# EAGLE board master_muhsin_v4 (EAGLE 7.1.0)
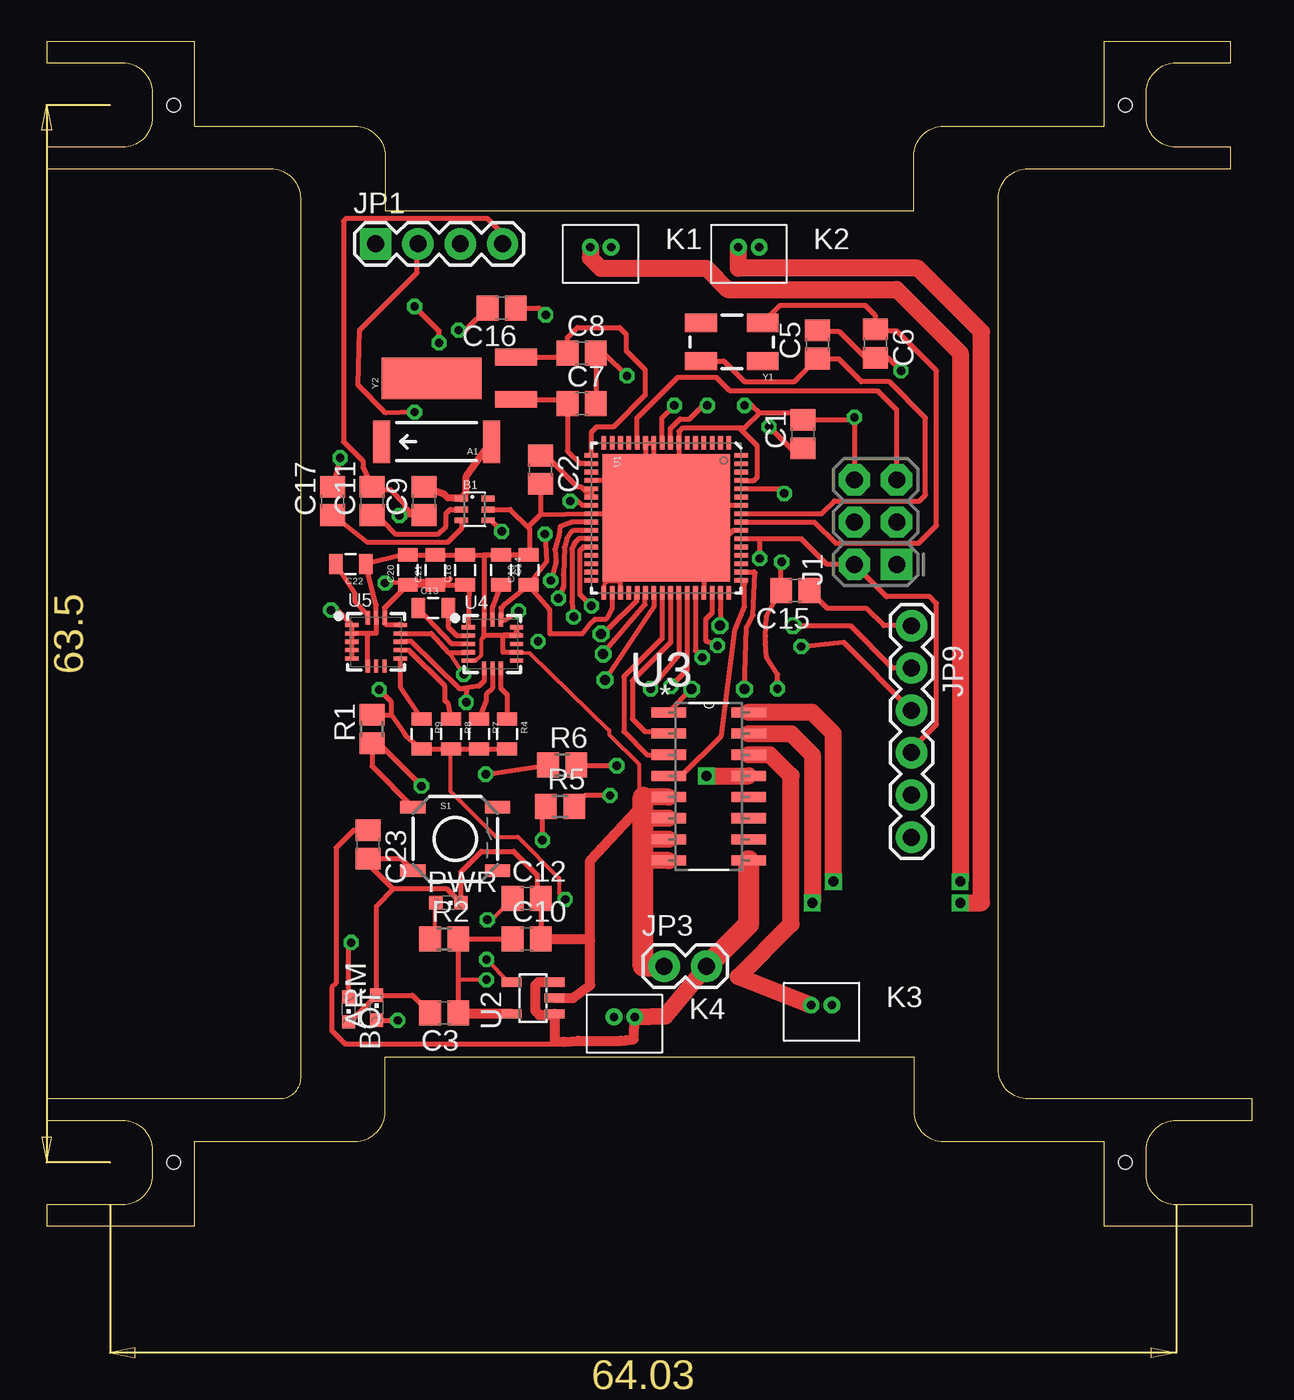
[diagram p0: board, top side]
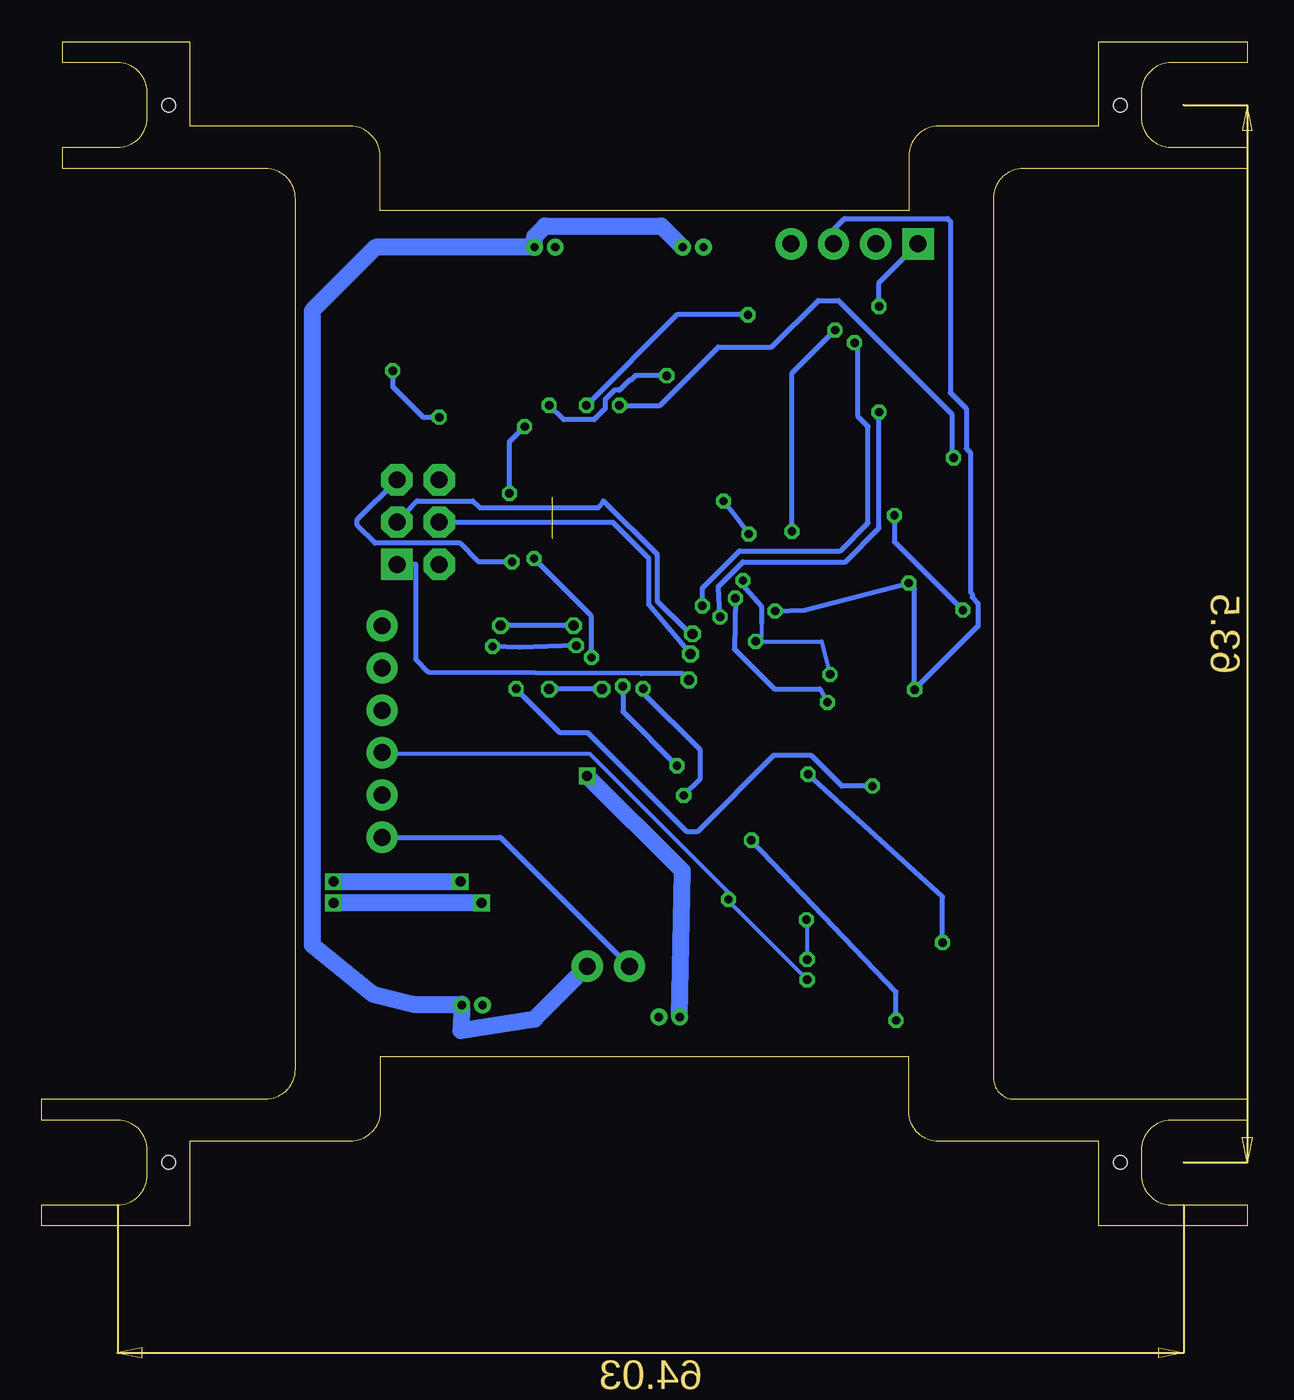
[diagram p1: board, bottom side, seen from below]

Size 72.39 x 71.12 mm. Coordinates in mm from the lower left corner, seen from the top.
Outline: 15.24,61.7 15.24,8.89 arc-90 13.97,7.62 0,7.62 0,6.35 4.55,6.35 arc-90 6.35,4.55 6.35,3.07 arc-90 4.55,1.27 0,1.27 0,0 8.89,0 8.89,5.08 18.52,5.08 arc90 20.32,6.88 20.32,10.16 52.07,10.16 52.07,6.88 arc90 53.87,5.08 63.5,5.08 63.5,0 72.39,0 72.39,1.27 67.84,1.27 arc-90 66.04,3.07 66.04,4.55 arc-90 67.84,6.35 72.39,6.35 72.39,7.62 58.95,7.62 arc-90 57.15,9.42 57.15,61.7 arc-90 58.95,63.5 71.12,63.5 71.12,64.77 67.84,64.77 arc-90 66.04,66.57 66.04,68.05 arc-90 67.84,69.85 71.12,69.85 71.12,71.12 63.5,71.12 63.5,66.04 53.87,66.04 arc90 52.07,64.24 52.07,60.96 20.32,60.96 20.32,64.24 arc90 18.52,66.04 8.89,66.04 8.89,71.12 0,71.12 0,69.85 4.55,69.85 arc-90 6.35,68.05 6.35,66.57 arc-90 4.55,64.77 0,64.77 0,63.5 13.44,63.5 arc-90 15.24,61.7
Copper layers (1*16): Top 0.035559375mm / dielectric 1.501140625mm / Bottom 0.035559375mm
Design rules "4pcb-33board": minimum track width 10mil, minimum drill 15mil, track to track 6mil, track to pad 6mil, pad to pad 6mil, via to via 6mil, smd to smd 6mil, copper to edge 10mil, drill to drill 10mil, minimum pad ring 10mil, minimum via ring 8mil, stop-mask expansion 4mil, vias tented up to drill 0mil, thermal gap 10mil
Net classes: 1 RFSIG: width 0.457 mm, clearance 0.205 mm to class 0, clearance 0.205 mm
Holes 0.8 mm at 7.62,67.31 64.77,67.31 64.77,3.81 7.62,3.81

## Footprints (pad centres in the part's own frame; a part is rotated, then mirrored left to right if it is on the bottom)
ANTENNA-CHIP5 = smd 1.016 x 2.54: FEED -3.302,0; NC 3.302,0
CHIPLED_0603 = smd 0.8 x 0.8: A 0,-0.75; C 0,0.75
BALUN = smd 0.35 x 0.8: 1 -0.65,-0.8; 2 0,-0.8; 3 0.65,-0.8; 4 0.65,0.8; 5 0,0.8; 6 -0.65,0.8
C0805 = smd 1.3 x 1.5: 1 -0.85,0; 2 0.85,0
0805 = smd 0.8 x 1.2: 1 -0.9,0; 2 0.9,0
2X3-NS = drill 1.016 pad 1.88 square: 1 -2.54,-1.27 | drill 1.016 pad 1.88 octagon: 2 -2.54,1.27; 3 0,-1.27; 4 0,1.27; 5 2.54,-1.27; 6 2.54,1.27
1X04 = drill 1.016 pad 1.88 square: 1 0,0 | drill 1.016 pad 1.88: 2 2.54,0; 3 5.08,0; 4 7.62,0
1X02 = drill 1.016 pad 1.88: 1 0,0; 2 2.54,0
FTDI_BASIC = drill 1.016 pad 1.88: CTS 10.16,0; DTR 0,0; GND 12.7,0; RXI 2.54,0; TXO 5.08,0; VCC 7.62,0
653002114822 = drill 0.5: 1 0.625,0; 2 -0.625,0
R0805 = smd 1.3 x 1.5: 1 -0.85,0; 2 0.85,0
TACTILE_SWITCH_SMD = smd 1.524 x 0.762: 1 -2.54,1.905; 2 2.54,1.905; 3 -2.54,-1.905; 4 2.54,-1.905
QFN-64 = smd 0.8 x 0.28: 1 -4.5,3.75; 2 -4.5,3.25; 3 -4.5,2.75; 4 -4.5,2.25; 5 -4.5,1.75; 6 -4.5,1.25; 7 -4.5,0.75; 8 -4.5,0.25; 9 -4.5,-0.25; 10 -4.5,-0.75; 11 -4.5,-1.25; 12 -4.5,-1.75; 13 -4.5,-2.25; 14 -4.5,-2.75; 15 -4.5,-3.25; 16 -4.5,-3.75; 33 4.5,-3.75; 34 4.5,-3.25; 35 4.5,-2.75; 36 4.5,-2.25; 37 4.5,-1.75; 38 4.5,-1.25; 39 4.5,-0.75; 40 4.5,-0.25; 41 4.5,0.25; 42 4.5,0.75; 43 4.5,1.25; 44 4.5,1.75; 45 4.5,2.25; 46 4.5,2.75; 47 4.5,3.25; 48 4.5,3.75 | smd 0.28 x 0.8: 17 -3.75,-4.5; 18 -3.25,-4.5; 19 -2.75,-4.5; 20 -2.25,-4.5; 21 -1.75,-4.5; 22 -1.25,-4.5; 23 -0.75,-4.5; 24 -0.25,-4.5; 25 0.25,-4.5; 26 0.75,-4.5; 27 1.25,-4.5; 28 1.75,-4.5; 29 2.25,-4.5; 30 2.75,-4.5; 31 3.25,-4.5; 32 3.75,-4.5; 49 3.75,4.5; 50 3.25,4.5; 51 2.75,4.5; 52 2.25,4.5; 53 1.75,4.5; 54 1.25,4.5; 55 0.75,4.5; 56 0.25,4.5; 57 -0.25,4.5; 58 -0.75,4.5; 59 -1.25,4.5; 60 -1.75,4.5; 61 -2.25,4.5; 62 -2.75,4.5; 63 -3.25,4.5; 64 -3.75,4.5 | smd 7.65 x 7.65: 65 0,0
SOT23-DBV = smd 0.55 x 1.2: 1 -0.95,-1.3; 2 0,-1.3; 3 0.95,-1.3; 4 0.95,1.3; 5 -0.95,1.3
SOIC127P600X175-16N = smd 2.057 x 0.61: 1 -4.801,8.89; 2 -4.801,7.62; 3 -4.801,6.35; 4 -4.801,5.08; 5 -4.801,3.81; 6 -4.801,2.54; 7 -4.801,1.27; 8 -4.801,0; 9 0,0; 10 0,1.27; 11 0,2.54; 12 0,3.81; 13 0,5.08; 14 0,6.35; 15 0,7.62; 16 0,8.89
LGA16_3X3MM = smd 0.8 x 0.25: 1 -1.45,1; 2 -1.45,0.5; 3 -1.45,0; 4 -1.45,-0.5; 5 -1.45,-1; 9 1.45,-1; 10 1.45,-0.5; 11 1.45,0; 12 1.45,0.5; 13 1.45,1 | smd 0.25 x 0.8: 6 -0.5,-1.45; 7 0,-1.45; 8 0.5,-1.45; 14 0.5,1.45; 15 0,1.45; 16 -0.5,1.45
CRYSTAL-SMD-5X3 = smd 1.9 x 1.1: 1 -1.85,-1.15; 2 1.85,-1.15; 3 1.85,1.15; 4 -1.85,1.15
CRYSTAL-32KHZ-SMD = smd 2.5 x 6: SHEILD 0,5.08 | smd 1 x 2.5: X1 -1.27,0; X2 1.27,0

## Placement (x,y rotation side)
A1  ANTENNA2SMD5  [ANTENNA-CHIP5]  23.42,47.09 180 top
ARM  GREEN  [CHIPLED_0603]  19.81,13.11 0 top
B1  748421245  [BALUN]  25.7,43.03 270 top
BOT  GREEN  [CHIPLED_0603]  18.14,13 180 top
C1  1uF  [C0805]  45.42,47.55 90 top
C2  1uF  [C0805]  29.67,45.42 270 top
C3  1uF  [C0805]  23.88,12.8 180 top
C5  12pF  [C0805]  46.28,52.93 90 top
C6  12pF  [C0805]  49.78,52.98 270 top
C7  12pF  [C0805]  32.13,49.38 0 top
C8  12pF  [C0805]  32.13,52.43 0 top
C9  0.75pF  [C0805]  22.66,43.54 90 top
C10  1uF  [C0805]  28.83,17.25 0 top
C11  22pF  [C0805]  19.56,43.54 90 top
C12  10nF  [C0805]  28.83,19.66 0 top
C13  0.22uF  [0805]  23.22,37.11 0 top
C14  4.7uF  [0805]  27.28,39.4 270 top
C15  0.1uF  [C0805]  44.96,38.15 180 top
C16  JUMP  [C0805]  27.33,55.12 180 top
C17  JUMP  [C0805]  17.17,43.54 90 top
C18  10uF  [0805]  25.12,39.4 90 top
C19  0.1uF  [0805]  28.93,39.4 90 top
C20  10uF  [0805]  21.69,39.4 90 top
C21  0.1uF  [0805]  23.34,39.4 90 top
C22  10nF (25V)  [0805]  18.26,39.75 180 top
C23  1uF  [C0805]  19.3,22.91 270 top
J1  ISP  [2X3-NS]  49.78,42.27 90 top
JP1  Debuger  [1X04]  19.76,58.98 0 top
JP3  Battery  [1X02]  37.08,15.6 0 top
JP9  FTDI  [FTDI_BASIC]  51.94,36.04 270 top
K1  653002114822  [653002114822]  33.27,58.78 0 top
K2  653002114822  [653002114822]  42.16,58.78 0 top
K3  653002114822  [653002114822]  46.53,13.26 0 top
K4  653002114822  [653002114822]  34.7,12.55 0 top
PWR  RED  [CHIPLED_0603]  24.13,19.41 270 top
R1  10k  [R0805]  19.53,29.84 90 top
R2  330  [R0805]  23.88,17.25 0 top
R4  10k  [0805]  27.66,29.54 270 top
R5  330  [R0805]  30.84,25.2 0 top
R6  330  [R0805]  30.96,27.69 0 top
R7  10k  [0805]  25.96,29.54 270 top
R8  10k  [0805]  24.28,29.54 270 top
R9  10k  [0805]  22.5,29.54 270 top
S1  [TACTILE_SWITCH_SMD]  24.54,23.24 0 top
U1  ATMEGA128RFA1  [QFN-64]  37.21,42.52 270 top
U2  TPS73633-DBVT  [SOT23-DBV]  29.21,13.69 90 top
U3  ULN2003ADR  [SOIC127P600X175-16N]  42.16,21.95 0 top
U4  LSM303D  [LGA16_3X3MM]  26.77,34.95 0 top
U5  L3GD20H  [LGA16_3X3MM]  19.79,35.08 0 top
Y1  16MHz  [CRYSTAL-SMD-5X3]  41.15,53.09 180 top
Y2  32.768kHz  [CRYSTAL-32KHZ-SMD]  28.19,50.9 90 top

## Library data of the parts
A1 B1 = SparkFun-RF
ARM BOT PWR = led
C1-C3 C5-C12 C15-C17 C23 R1 R2 R5 R6 = resistor
C13 C14 C18-C22 = SparkFun-Capacitors
J1 JP1 JP9 = SparkFun-Connectors
JP3 = SparkFun
K1-K4 = Wuerth_Elektronik_eiCan_Wire_to_Board_Connectors; OC_FARNELL: unknown
R4 R7-R9 = SparkFun-Passives
S1 = SparkFun-Electromechanical
U1 = SparkFun-DigitalIC
U2 = Power
U3 = Texas Instruments_By_element14_Batch_1; MPN: ULN2003ADR; OC_FARNELL: 1470513; OC_NEWARK: 77C3560; PACKAGE: SOIC-16; SUPPLIER: TEXAS INSTRUMENTS
U4 U5 = IMU_parts
Y1 Y2 = SparkFun-FreqCtrl

## Nets
3.3V: C3.1 C10.1 C18.1 C19.1 C20.1 C21.1 J1.2 JP1.3 JP9.VCC R1.2 R2.2 R4.2 R7.2 R8.2 R9.2 U1.23 U1.34 U1.44 U1.54 U1.59 U2.5 U4.1 U4.14 U5.13 U5.14
AVDD: C1.1 U1.60
DTR: C15.1 JP9.DTR
DVDD: C2.1 U1.21 U1.22
GND: ARM.C B1.5 BOT.C C1.2 C2.2 C3.2 C5.2 C6.2 C7.2 C8.2 C9.1 C10.2 C11.2 C12.2 C14.1 C18.2 C19.2 C20.2 C21.2 C22.1 C23.2 J1.6 JP1.4 JP3.1 JP9.GND PWR.C S1.3 U1.7 U1.10 U1.11 U1.20 U1.24 U1.33 U1.35 U1.45 U1.55 U1.58 U1.61 U1.65 U2.2 U3.5 U3.6 U3.7 U3.8 U4.5 U4.10 U4.12 U4.13 U4.16 U5.1 U5.2 U5.3 U5.4 U5.5 U5.6 U5.15
MISO: J1.1 U1.39
MOSI: J1.4 U1.38
N$1: C12.1 U2.4
N$2: PWR.A R2.1
N$3: C5.1 U1.57 Y1.3
N$4: C6.1 U1.56 Y1.1
N$5: C7.1 U1.18 Y2.X1
N$6: C8.1 U1.17 Y2.X2
N$7: B1.2 C11.1
N$8: ARM.A R5.1
N$9: C13.1 U4.3
N$10: B1.4 C16.2
N$11: B1.3 C17.1
N$12: C13.2 U4.2
N$13: BOT.A R6.1
N$14: R4.1 U4.8
N$15: R7.1 U4.7
N$16: C14.2 U4.15
N$17: R8.1 U5.10
N$18: R9.1 U5.9
N$19: C22.2 U5.16
N$29: K1.2 U3.16
N$30: K2.2 U3.15
N$31: K3.2 U3.14
N$32: K4.2 U3.13
PB4: U1.40 U3.3
PB5: U1.41 U3.2
PB6: R5.2 U1.42
PB7: R6.2 U1.43
PE3: U1.49 U3.4
PE4: U1.50 U3.1
RESET: C15.2 J1.5 R1.1 S1.1 U1.12
RFANT [RFSIG]: A1.FEED B1.1 C9.2
RFN: C17.2 U1.9
RFP: C16.1 U1.8
RX0: JP9.TXO U1.46
RX1: JP1.2 U1.27
SCK: J1.3 U1.37
SCL: U1.25 U4.4 U5.12
SDA: U1.26 U4.6 U5.11
TX0: JP9.RXI U1.47
TX1: JP1.1 U1.28
VBAT: C23.1 JP3.2 K1.1 K2.1 K3.1 K4.1 U2.1 U2.3 U3.9

## Tracks (layer width: path | path; a pad name or v marks a point on that pad's centre or on a via)
3.3V  (via drill 0.5)  (1 unrouted)
  Top 0.254: R4.2 24.24,28.64 24.23,28.65 24.23,26.11 26.98,23.37 28.3,23.37 30.78,20.88 30.78,19.96 v31.14,19.61 | v26.42,14.78 24.73,14.78
  Top 0.305: 42.72,41.25 45.34,41.25 46.86,39.73 J1.2 50.44,37.8 53.04,37.8 53.44,37.39 53.44,30.12 51.94,28.63 JP9.VCC | 42.72,41.25 41.73,41.25 U1.54 | U4.1 25.38,38.42 C18.1 23.88,38.49 | U5.14 20.3,37.11 C20.1 C21.1 23.88,38.49 | U5.14 | C19.1 27.55,37.36 27.53,37.36 27.28,37.11 U4.14 27.56,36.4 v28.35,36.93 | U1.23 32.17,43.27 31.95,43.48 v31.45,43.54 | v29.92,41.55 30.02,39.89 C19.1 | C10.1 R2.2 24.73,14.78 C3.1 | R1.2 20.71,30.7 | 20.71,30.7 21.49,29.57 21.58,29.41 R9.2 R8.2 R7.2 R4.2 | U5.14 20.3,36.2 20.37,36.12 21.2,36.12 U5.13 | v20.32,38.61 24.23,38.85 23.88,38.49 | 20.71,30.7 20.71,31.46 v19.96,32.21 | U1.34 33.96,37.06 33.68,36.52 33.58,36.42 32.92,36.42 32.61,36.12 32.16,35.56 30.23,35.56 30.23,36.98 30.17,37.03 30.19,37.03 C19.1 | U1.44 38.96,34.55 v39.37,34.14 | v42.82,40.08 42.82,41.15 42.72,41.25
  Top 0.61: U2.5 24.79,12.74 C3.1
  Bottom 0.254: v26.42,14.78 31.14,19.51 v31.14,19.61 31.14,20.02 39.47,28.35 51.87,28.35 JP9.VCC
  Bottom 0.305: v31.45,43.54 30.84,42.77 v29.92,41.55 | v28.35,36.93 26.57,36.98 v20.32,38.61 19.96,38.25 v19.96,32.21 16.15,36.02 16.15,37.39 16.51,37.74 16.51,37.95 16.61,38.05 16.61,46.43 16.87,46.69 16.87,49.07 17.83,50.04 17.83,60.35 17.98,60.5 24.18,60.5 24.84,59.84 JP1.3 | v39.37,34.14 39.37,36.63 v42.82,40.08
AVDD  (via drill 0.5)
  Top 0.305: U1.60 44.02,44.27 v44.3,43.99 | v43.38,48.01 44.91,46.48 45.2,46.48 C1.1
  Bottom 0.305: v44.3,43.99 44.3,47.09 v43.38,48.01
DTR
  Top 0.305: JP9.DTR 50.27,36.04 49.23,37.08 46.88,37.08 C15.1
DVDD
  Top 0.305: C2.1 29.99,46.27 31.85,44.4 32.08,44.4 U1.22 U1.21
GND  (via drill 0.5)
  Top 0.254: U4.5 25.77,33.95 26.11,34.29 26.11,35.2 26.16,35.26 | 26.16,35.26 26.37,35.46 | 26.16,35.26 26.16,35.31 26.31,35.46 27.38,35.46 | 27.38,35.46 28.4,35.46 28.45,35.51 27.43,35.51 27.38,35.46 | 27.38,35.46 27.38,34.54 27.43,34.49 28.5,34.49 28.55,34.44 29.01,34.39 33.78,29.77 33.78,29.52 35.56,27.74 35.56,26.01 35.81,25.76 | U1.33 33.48,38.1 33.48,38.51 33.68,38.71 34.39,38.71 U1.65
  Top 0.305: U4.10 27.41,34.45 27.41,34.44 27.41,35.46 | 27.41,35.46 28.17,35.46 | 28.17,35.46 U4.12 U4.13 28.22,35.51 28.17,35.46 | 27.41,35.46 27.38,35.46 26.37,35.46 26.31,35.46 26.26,35.46 U4.16 26.26,40.28 26.27,40.3 C19.2 | U5.5 U5.4 U5.3 U5.2 | U5.2 U5.1 17.43,36.98 v17.07,36.98 | 19.41,35.59 19.79,35.59 U5.15 19.79,37.3 C22.1 21.33,40.3 C20.2 C21.2 C18.2 C14.1 C19.2 | 19.41,35.59 U5.2 | U5.6 19.29,35.47 19.41,35.59 | C7.2 C8.2 33.48,52.43 v34.85,51.05 | C5.2 46.37,53.7 47.6,53.7 49.16,52.13 C6.2 50.53,52.13 v51.31,51.36 | J1.6 v48.51,48.56 48.35,48.4 C1.2 45,48.82 42.82,48.82 | B1.5 27.84,43.03 28.91,41.96 | 28.91,41.96 29.01,41.86 29.01,40.37 C19.2 | C2.2 29.67,42.72 | 29.67,42.72 28.91,41.96 | 29.67,42.72 32.66,42.77 U1.24 | U1.11 U1.10 36.47,47.01 36.47,46.23 36.83,45.87 37.64,45.87 37.96,46.19 U1.7 37.96,47.72 38.15,47.9 41.61,47.9 | U1.61 42.48,44.77 42.67,44.96 42.67,46.84 41.61,47.9 | 42.82,48.82 41.91,47.9 41.61,47.9 | U1.11 35.96,45.46 35.26,44.76 34.34,44.76 | 34.34,44.76 32.73,44.76 U1.20 | U1.55 41.21,41.77 40.59,41.15 | 40.59,41.15 39.62,40.18 39.62,39.22 39.47,39.06 39.47,38.03 U1.45 | 34.95,42.77 36.96,42.77 U1.65 | U1.24 34.95,42.77 | 34.95,42.77 35.87,41.86 35.71,41.86 34.39,40.54 34.39,39.22 34.54,39.06 34.54,39.01 34.44,38.91 34.44,38.04 U1.35 | U1.24 33.73,42.77 33.73,44.15 34.34,44.76 | S1.3 21.27,22.06 C23.2 19.3,21.74 20.78,20.27 20.88,20.27 | 20.88,20.27 24.02,20.27 PWR.C 24.88,21.27 26.11,22.5 28.04,22.5 29.46,21.08 29.46,19.88 C12.2 C10.2 | ARM.C 21.97,13.86 C3.2 | BOT.C 18.21,12.26 ARM.C | ARM.C 19.81,19.2 20.88,20.27 | C9.1 22.03,42.69 | 22.03,42.69 21.54,43.18 21.54,43.33 20.68,44.2 20.36,44.2 C11.2 19,45.55 19,45.92 17.83,47.09 17.83,60.35 17.98,60.5 26.47,60.5 27.38,59.59 JP1.4
  Top 0.305: U1.11 35.96,44.91 37.54,43.33 37.54,43.23 39.62,41.15 40.59,41.15 | U1.11 35.96,45.83 38.51,43.28 41.7,43.28 U1.58 | v41.91,49.28 42.37,49.28 42.82,48.82 | 22.03,42.69 21.2,42.69 v21.18,42.67
  Top 0.61: U2.2 31.62,13.69 32.64,14.45 32.64,17.12 | 32.64,17.12 32.64,21.95 35.81,25.38 | C10.2 32.51,17.25 32.64,17.12
  Top 1.016: U3.5 35.81,25.76 | U3.6 35.81,24.49 | U3.7 35.81,23.22 | U3.8 35.81,21.95
  Top 1.27: JP3.1 35.81,15.6 35.81,21.95 35.81,23.22 35.81,24.49 35.81,25.38 35.81,25.76
  Bottom 0.305: JP9.GND 44.83,23.34 JP3.1 | v51.31,51.36 51.31,50.39 49.48,48.56 v48.51,48.56 | v34.85,51.05 36.73,51.05 36.98,50.8 37.08,50.8 37.69,50.19 38,50.19 38.56,49.63 38.56,49.07 39.22,48.41 41.05,48.41 v41.91,49.28 | v21.18,42.67 21.18,41.1 v17.07,36.98
MISO  (via drill 0.6)
  Top 0.305: U1.39 36.46,37.2 v33.53,32.79
  Bottom 0.305: v33.53,32.79 33.91,33.17 36.37,33.17 49.15,33.25 49.91,34.01 49.91,39.73 J1.1
MOSI  (via drill 0.6)
  Top 0.305: v33.43,34.34 33.45,34.39 35.94,37.31 35.94,38 U1.38
  Bottom 0.305: J1.4 38.1,42.27 35.94,40.11 35.94,37.31 v33.43,34.34
N$1  (via drill 0.5)
  Top 0.254: U2.4 27.78,14.64 v26.42,16 | v26.47,18.39 26.71,18.39 C12.1
  Bottom 0.254: v26.42,16 26.42,18.34 v26.47,18.39
N$2
  Top 0.254: PWR.A 23.32,19.41 23.32,17.48 23.11,17.27 R2.1
N$3
  Top 0.305: Y1.3 40.67,51.94 41.91,50.7 44.91,50.7 45.16,50.95 45.16,50.97 C5.1 47.54,52.08 48.92,50.7 50.6,50.7 52.78,48.51 52.78,43.89 52.43,43.54 47.3,43.54 46.53,42.77 U1.57
N$4
  Top 0.305: Y1.1 44.03,55.27 49.17,55.27 49.78,54.66 C6.1 49.87,53.75 51.05,53.75 53.44,51.36 53.44,42.06 52.38,41 47.4,41 46.12,42.27 U1.56
N$5
  Top 0.305: Y2.X1 31.03,49.63 C7.1 31.28,46.55 32.06,45.77 U1.18
N$6
  Top 0.305: Y2.X2 31.03,52.17 C8.1 31.28,53.35 31.88,53.95 34.42,53.95 34.8,53.57 34.8,52.55 35.94,51.41 35.94,49.89 34.04,47.98 33.02,47.98 32.71,47.67 U1.17
N$7
  Top 0.305: C11.1 20.17,42.32 20.93,41.55 23.52,41.55 23.98,42.01 23.98,42.77 24.23,43.03 B1.2
N$8  (via drill 0.5)
  Top 0.305: ARM.A 20.66,12.36 v21.08,12.34 | v29.77,23.16 29.77,24.98 R5.1
  Bottom 0.305: v21.08,12.34 21.08,14.07 v29.77,23.16
N$9
  Top 0.305: U4.3 24.35,34.95 C13.1
N$10  (via drill 0.5)
  Top 0.305: B1.4 26.66,42.38 v27.33,41.71 | v24.74,53.8 25.16,53.8 C16.2
  Bottom 0.305: v27.33,41.71 27.33,51.21 v24.74,53.8
N$11
  Top 0.305: B1.3 24.91,41.87 24.08,41.05 19.27,41.05 C17.1
N$12
  Top 0.305: C13.2 24.12,35.95 24.61,35.46 U4.2
N$13  (via drill 0.5)
  Top 0.305: BOT.A 18.14,16.87 v18.29,17.02 | v26.37,27.13 R6.1
  Bottom 0.305: v18.29,17.02 18.29,19.76 v26.37,27.13
N$14
  Top 0.305: U4.8 27.27,32.29 27.66,31.9 R4.1
N$15
  Top 0.305: U4.7 26.77,32.28 26.39,31.9 26.39,31.53 R7.1
N$16
  Top 0.305: U4.15 26.77,37.1 C14.2
N$17
  Top 0.305: R8.1 24.13,31.34 23.93,31.55 23.93,32.41 21.77,34.57 U5.10
N$18
  Top 0.305: U5.9 21.24,32.37 R9.1
N$19
  Top 0.305: U5.16 19.29,36.72 18.52,37.49 18.52,37.99 C22.2
N$29  (via drill 0.6)
  Top 1.016: K1.2 32.65,58.13 33.27,57.51 39.62,57.51 40.89,56.24 51.05,56.24 54.86,52.43 v54.86,20.68 | v47.24,20.68 47.24,29.57 45.97,30.84 U3.16
  Bottom 1.016: v54.86,20.68 v47.24,20.68
N$30  (via drill 0.6)
  Top 1.016: U3.15 44.7,29.57 45.97,28.3 v45.97,19.41 | v54.86,19.41 56.13,19.41 56.13,53.7 52.32,57.51 41.54,57.51 K2.2
  Bottom 1.016: v45.97,19.41 v54.86,19.41
N$31
  Top 1.016: K3.2 41.54,14.97 44.7,18.14 44.7,27.03 43.43,28.3 U3.14
N$32  (via drill 0.6)
  Top 1.016: v39.62,27.03 U3.13
  Bottom 1.016: K4.2 33.92,21.32 v39.62,27.03
PB4
  Top 0.305: U1.40 36.96,35.28 34.67,32.99 34.67,29.69 36.07,28.3 U3.3
PB5
  Top 0.305: U1.41 37.46,35.02 35.18,32.74 35.18,30.45 35.94,29.69 36.7,29.69 36.83,29.57 U3.2
PB6  (via drill 0.5)
  Top 0.305: U1.42 37.96,34.3 v36.27,32.26 | v33.83,25.86 32.35,25.86 R5.2
  Bottom 0.305: v36.27,32.26 36.27,32 32.87,28.6 32.87,26.82 v33.83,25.86
PB7  (via drill 0.5)
  Top 0.305: U1.43 38.46,33.38 v37.49,32.41 | v34.24,27.64 31.86,27.64 R6.2
  Bottom 0.305: v37.49,32.41 37.49,30.89 v34.24,27.64
PE3
  Top 0.305: U3.4 38.1,27.03 40.51,29.44 41.33,35.79 41.91,37.19 41.91,38.57 U1.49
PE4  (via drill 0.6)
  Top 0.305: U3.1 37.36,30.86 v38.73,32.23 | v41.91,32.23 42.01,35.94 42.42,36.68 42.55,39.22 42.49,39.27 U1.50
  Bottom 0.305: v38.73,32.23 v41.91,32.23
RESET  (via drill 0.5)
  Top 0.305: J1.5 51.05,49 49.91,50.14 41.05,50.14 40.23,50.95 37.9,50.95 35.43,48.49 35.43,47.05 U1.12 | v44.15,39.88 44.11,39.84 C15.2 43.23,36.61 43.18,35.41 43.18,35.05 43.23,34.14 43.89,33.12 v43.89,32.26 | S1.1 19.53,27.61 R1.1 19.92,29 v22.5,26.42
  Bottom 0.305: v44.15,39.88 46.13,39.88 47.24,41 52.38,41 53.44,42.06 53.44,42.42 J1.5 | v22.5,26.42 24.33,26.42 26.16,28.25 28.45,28.25 33.02,23.67 33.63,23.67 39.57,29.62 41.25,29.62 v43.89,32.26
RFANT
  Top 0.406: C9.2 23.84,43.98 24.08,43.74 24.84,43.74 B1.1 24.91,43.75 25.2,44.04 25.2,45.01 A1.FEED
RFN  (via drill 0.5)
  Top 0.305: U1.9 36.96,48.54 v37.69,49.28 | v17.63,46.13 C17.2
  Bottom 0.305: v37.69,49.28 35.26,49.28 31.75,52.78 28.55,52.78 25.76,55.58 24.54,55.58 17.73,48.77 17.73,46.23 v17.63,46.13
RFP  (via drill 0.5)
  Top 0.305: C16.1 29.57,55.12 v29.97,54.71 | U1.8 37.44,47.04 37.44,47.85 38.05,48.46 38.61,48.46 39.42,49.28 v39.68,49.28
  Bottom 0.305: v29.97,54.71 34.24,54.71 v39.68,49.28
RX0  (via drill 0.5)
  Top 0.305: U1.46 39.96,36.81 39.57,36.42 39.57,35.15 v40.28,34.85 | v45.31,34.8 47.85,35.05 JP9.TXO
  Bottom 0.305: v40.28,34.85 43.69,34.75 v45.31,34.8
RX1  (via drill 0.5)
  Top 0.305: U1.27 31.97,41.27 31.7,41 31.6,40.79 31.55,40.64 31.55,37.44 v31.65,36.58 | v22.1,48.87 20.37,48.82 18.69,50.49 18.8,53.8 22.25,57.25 22.25,58.93 JP1.2
  Bottom 0.305: v31.65,36.58 31.75,38.41 30.28,39.88 24.13,39.88 22.1,41.91 v22.1,48.87
SCK  (via drill 0.6)
  Top 0.305: v33.3,35.56 33.78,35.92 35.43,37.52 35.43,37.99 U1.37
  Bottom 0.305: J1.3 49.84,43.54 46.48,43.54 46.08,43.13 38.96,43.13 38.86,43.23 38.66,43.54 35.43,40.34 35.43,37.52 33.78,35.92 v33.3,35.56
SCL  (via drill 0.5)
  Top 0.254: v25.04,33.12 24.28,34.27 24.1,34.44
  Top 0.305: U5.12 23.1,35.58 24.1,34.44 U4.4 | U1.25 31.55,42.27 30.84,42.01 30.78,41.5 30.53,40.64 30.58,39.88 v30.28,38.76
  Bottom 0.254: 29.16,36.22 29.16,35.41 v29.52,35.1 25.55,35.1 v25.04,33.12
  Bottom 0.305: v30.28,38.76 30.38,38.56 29.16,37.19 29.16,36.22
SDA  (via drill 0.5)
  Top 0.305: U4.6 26.27,32.72 25.96,32.41 24.79,32.26 | 24.79,32.26 21.89,35.1 21.26,35.1 U5.11 | U1.26 32.17,41.77 32.16,41.76 31.6,41.76 31.5,41.66 31.24,41.3 31.09,40.74 31.04,39.12 31.04,38.41 v30.73,37.69 | v25.2,31.45 25.25,32.26 24.79,32.26
  Bottom 0.305: v30.73,37.69 30.78,34.65 28.4,32.26 25.65,32.26 v25.2,31.45
TX0  (via drill 0.6)
  Top 0.305: JP9.RXI 50.8,33.5 48.26,36.04 v44.83,36.04 | U1.47 40.46,37.01 v40.44,36.04
  Bottom 0.305: v40.44,36.04 v44.83,36.04
TX1  (via drill 0.5)
  Top 0.305: U1.28 32.23,40.77 32,40.54 32,37.95 v32.71,37.24 | v23.57,53.03 23.57,53.75 v22.1,55.22
  Bottom 0.305: v32.71,37.24 32.71,38.3 30.48,40.54 24.44,40.54 22.76,42.22 22.76,48.01 23.37,48.62 23.37,52.83 v23.57,53.03 | v22.1,55.22 22.1,56.64 JP1.1
VBAT
  Top 0.305: C23.1 18.43,23.76 17.37,22.71 17.37,14.58 17.12,14.33 17.12,11.73 17.93,10.92 30.36,10.92 30.51,11.07
  Top 0.61: U2.3 29.52,14.64 29.34,14.45 29.34,12.93 29.59,12.68 30.44,12.68 U2.1 30.51,11.07 31.07,11.07 31.93,11.12 34.47,11.12 34.8,11.15 35.26,11.21 K4.1
  Top 1.016: K4.1 37.15,12.61 JP3.2
  Top 1.27: JP3.2 42.16,18.14 U3.9
  Bottom 1.016: JP3.2 42.79,12.43 47.21,11.73 K3.1 47.16,13.31 50.09,13.31 52.48,13.92 56.13,16.87 56.13,54.97 52.32,58.78 K2.1 42.79,59.42 42.16,60.05 35.17,60.05 K1.1